# Altium PCB 464HardwareProject.PcbDoc
Units mm, origin at the board's own origin, x right, y up, seen from the top; angles counter-clockwise.
Board outline 62 x 37 mm, 2 copper layers (Top Layer, Bottom Layer); 25 components, 21 nets, 74 pads, 10 vias.
Unrouted connection lines stored in the file: 2.
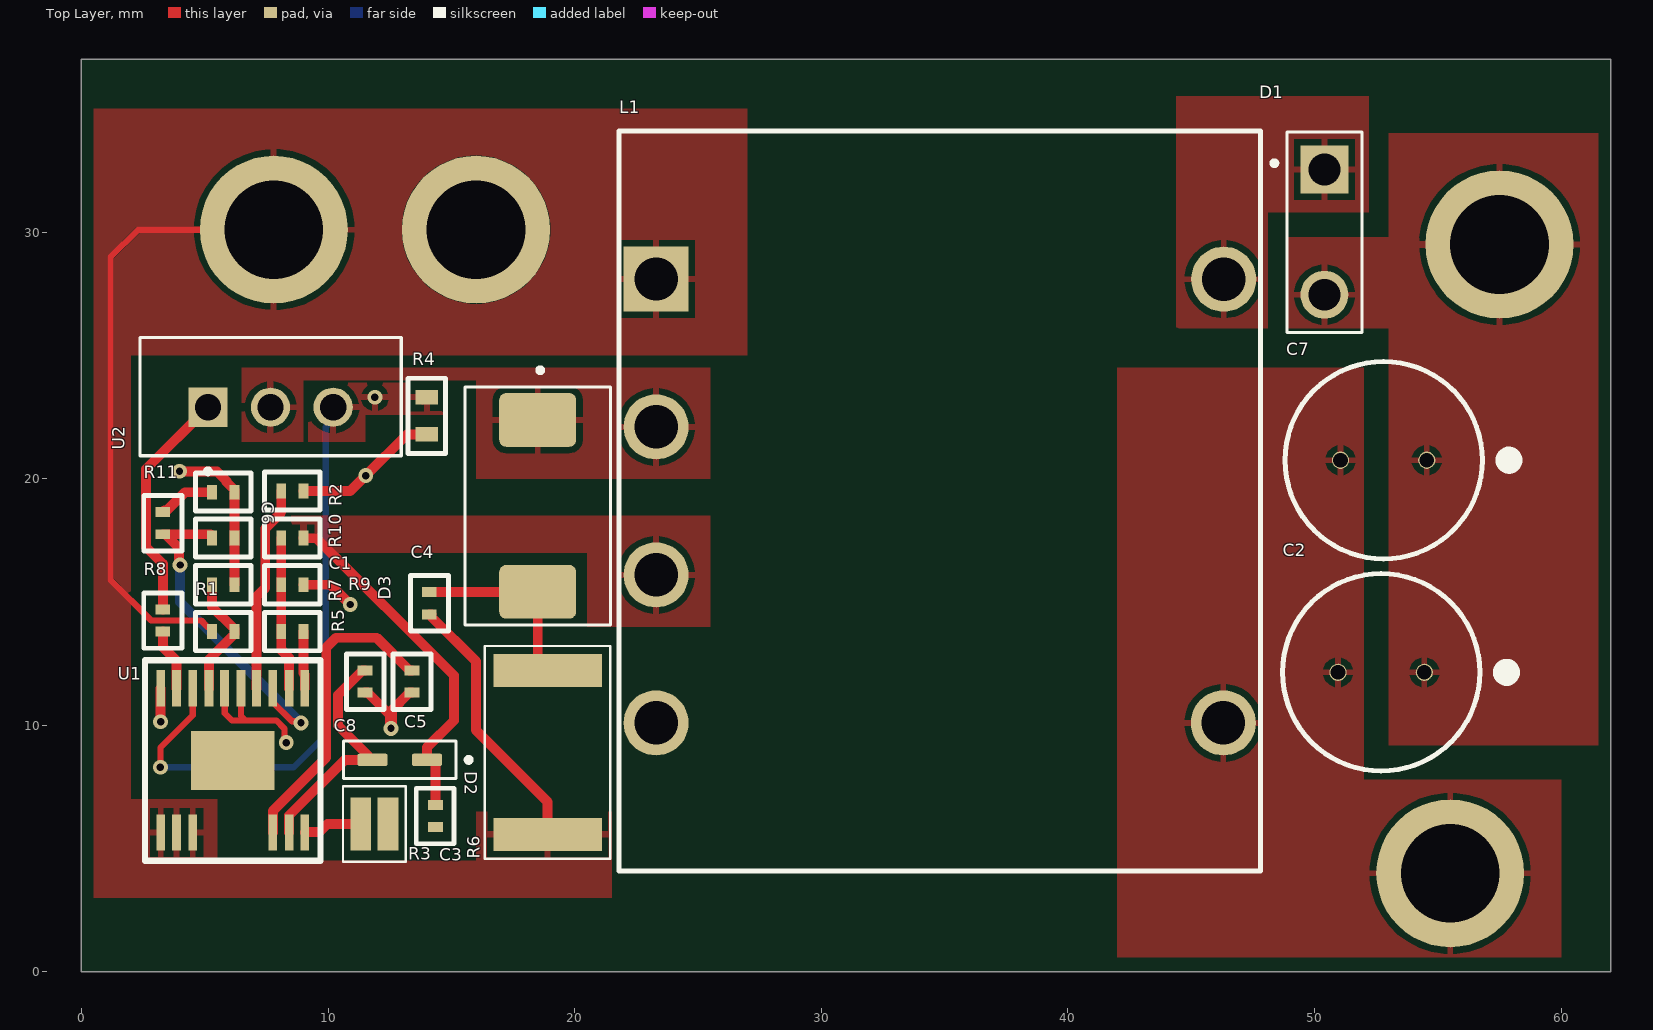
[diagram p0: Top Layer view]
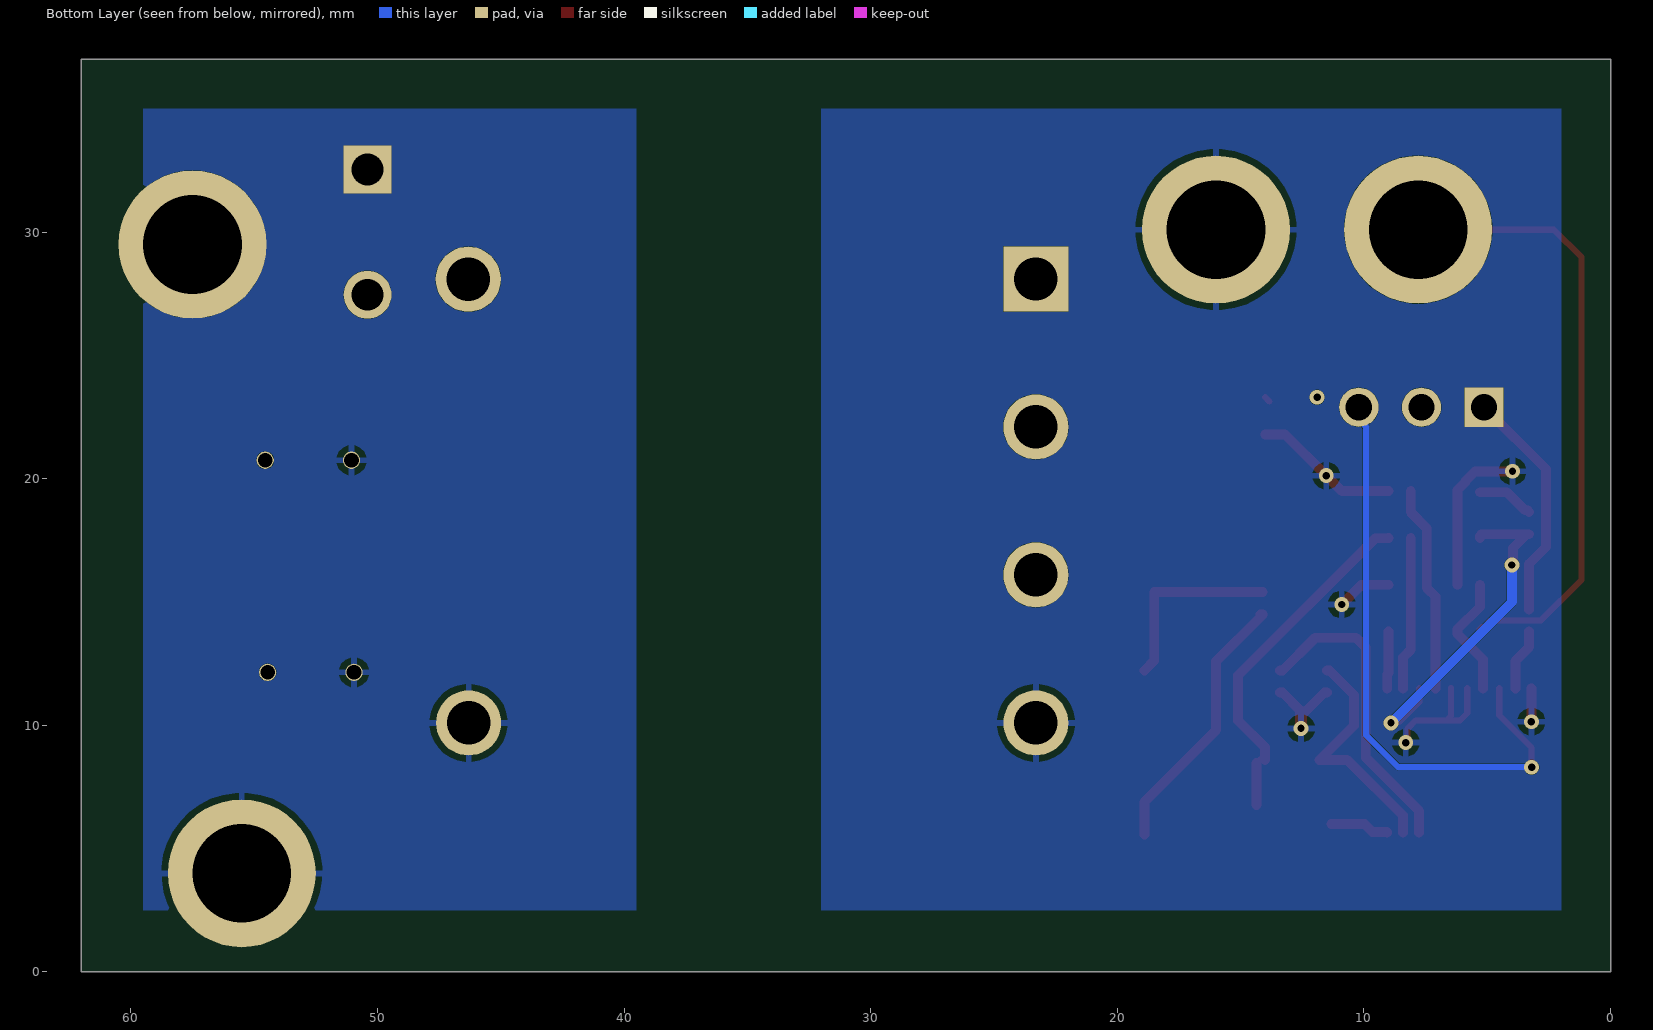
[diagram p1: Bottom Layer view, seen from below]

## Layer stack, top to bottom
Top Solder: solder mask 0.0102, Solder Resist, Dk 3.5
Top Layer: signal copper 0.0356
Dielectric 1: dielectric 0.32, FR-4, Dk 4.8
Bottom Layer: signal copper 0.0356
Bottom Solder: solder mask 0.0102, Solder Resist, Dk 3.5

## Board outline
0,37 0,0 62,0 62,37

## Design rules (kind name [scope] priority, off if disabled: settings)
Clearance [All] p1 off: gap=0.01 ignorepadtopadclearanceinfootprint=FALSE
Height [All] p1 off: minheight=0 maxheight=25.4 prefheight=12.7
PolygonConnect [All] p1: connectstyle=Relief reliefconductorwidth=0.254 reliefentries=4 polygonreliefangle="90 Angle" airgapwidth=0.254
RoutingVias [All] p1: holewidth=0.711 width=1.27 viastyle="Through Hole" minholewidth=0.711 minwidth=1.27 maxholewidth=0.711 maxwidth=1.27
SolderMaskExpansion [All] p1: expansion=0.102 istentingtop=FALSE
Width [All] p1: maxlimit=0.5 minlimit=0.254 preferedwidth=0.254 minimp=50.000000 maximp=50.000000 favimp=50.000000
29 further rules are at their usual default settings.

## Components (designator, comment, footprint, x,y, rotation, side; value= is the part's Value field where it differs from the comment)
C1 "4.7p" "C1 C0402 47pF" 5.75,17.6 r0 top
C2 "330uF" "C2 Output Cap 330uF 16V 13mohm" 52.7,12.15 r180 top
C3 "47pF" "C3 C0402 47pF 100V" 14.35,6.325 r90 top
C4 "1uF" "C6 C0402 1uF"#1 14.1,14.95 r270 top
C5 "4.7uF" "C6 C0402 1uF"#1 13.4,11.775 r270 top
C6 "0.1uF" "C6 C0402 1uF"#2 5.75,19.45 r0 top
C7 "330uF" "C2 Output Cap 330uF 16V 13mohm" 52.8,20.75 r180 top
C8 "4.7uF" "C4 C0402 4.7uF 16V" 11.5,11.775 r270 top
D1 "Diode" "D1 40A 860 mv TO220-2" 50.4,30 r270 top
D2 "Diode" "D2 1A 470mV SOD323-2" 12.905,8.6 r180 top
D3 "Diode" "D3 5A 1.15V DO-214AB" 18.5,18.9 r270 top
L1 "Transformer" TRANSFORMER 21.8,34.1 r270 top
R1 "1.5M" "R1 R0402 1.5M 0.2W" 5.75,13.8 r0 top
R2 "56.2K" "R2 R0402 56.2K" 8.55,19.5 r0 top
R3 "10K" "R3 R0805 10K 1W WIDE-CHIP" 11.875,6 r180 top
R4 "32m" "R4 R0603 32mohm sense" 14,22.55 r270 top
R5 "121K" "R5 R0402 121K" 8.55,13.8 r0 top
R6 "10K" "R11 R3540 10K 4W snubber" 18.9,8.9 r270 top
R7 "4.99K" "R7 R0402 4.99K" 8.55,15.7 r0 top
R8 "10mohm" "R10 R0402 10mohm gate" 3.3,14.25 r90 top
R9 "20K" "R9 R0402 20K" 5.75,15.7 r180 top
R10 "Resistor" "R6 R0402 44.2K 0.25W" 8.55,17.6 r180 top
R11 "10K" "R8 R0402 10K" 3.3,18.2 r90 top
U1 "LT8316IFE#TRPBF" LT8316 6.135,8.579 r90 top
U2 "700V Power Mos" "700V mos" 7.667,22.9 r0 top

## Footprints (in the part's own frame and the unit in brackets; to place one, negate y for a bottom-side part, rotate by r counter-clockwise, add the part's x,y. Pads: shape width x height; smd on the part's side, far side on the other; paste and mask are expansions set on the pad)
"700V mos" [mm]
  rect 1.59x1.59 hole 1.06: 1(-2.54,0)
  round 1.59 hole 1.06: 2(0,0) 3(2.54,0)
  silkscreen extent -5.3,-2.7 5.3,2.83, body extent -5.09,-6.18 5.09,5.13, height 20.48
"C1 C0402 47pF" [mm]
  rect 0.4x0.6 smd: 1(-0.45,0) 2(0.45,0)
  silkscreen extent -1.12,-0.77 1.12,0.77, body extent -0.5,-0.25 0.5,0.25, height 0.46
"C2 Output Cap 330uF 16V 13mohm" [mm]
  round 0.7 hole 0.6: 1(-1.75,0) 2(1.75,0)
  silkscreen extent -5.33,-4 4,4, body extent -4,-4 4,4, height 6.91
"C3 C0402 47pF 100V" [mm]
  rect 0.4x0.6 smd: 1(-0.45,0) 2(0.45,0)
  silkscreen extent -1.12,-0.76 1.12,0.77, body extent -0.5,-0.25 0.5,0.25, height 0.46
"C4 C0402 4.7uF 16V" [mm]
  rect 0.4x0.6 smd: 1(-0.45,0) 2(0.45,0)
  silkscreen extent -1.12,-0.76 1.12,0.77, body extent -0.5,-0.25 0.5,0.25, height 0.46
"C6 C0402 1uF"#1 [mm]
  rect 0.4x0.6 smd: 1(-0.45,0) 2(0.45,0)
  silkscreen extent -1.12,-0.76 1.12,0.77, body extent -0.5,-0.25 0.5,0.25, height 0.46
"C6 C0402 1uF"#2 [mm]
  rect 0.4x0.6 smd: 2(0.45,0) "   "(-0.45,0)
  silkscreen extent -1.12,-0.76 1.12,0.77, body extent -0.5,-0.25 0.5,0.25, height 0.46
"D1 40A 860 mv TO220-2" [mm]
  rect 1.94x1.94 hole 1.29: 1(-2.54,0)
  round 1.94 hole 1.29: 2(2.54,0)
  silkscreen extent -4.06,-2.13 4.06,1.52, body extent -4.83,-2.21 4.83,2.29, height 15.39
"D2 1A 470mV SOD323-2" [mm]
  rrect25% 1.21x0.5 smd: 1(-1.105,0) 2(1.105,0)
  silkscreen extent -2.89,-0.76 2.29,0.76, body extent -1.25,-0.62 1.25,0.63, height 1.06
"D3 5A 1.15V DO-214AB" [mm]
  rrect25% 2.18x3.12 smd: 1(-3.485,0) 2(3.485,0)
  silkscreen extent -5.6,-2.95 4.83,2.95, body extent -3.97,-2.95 3.97,2.95, height 2.63
LT8316 [mil]
  rect 58x14 smd: 1(-115,115) 2(-115,90) 3(-115,64) 8(-115,-64) 9(-115,-90) 10(-115,-115) 11(115,-115) 12(115,-90) 13(115,-64) 14(115,-38) 15(115,-13) 16(115,13) 17(115,38) 18(115,64) 19(115,90) 20(115,115)
  rect 94x134 smd: 21(0,0)
  silkscreen extent -160,-140 160,140, body extent -126,-128 126,128, height 42
"R1 R0402 1.5M 0.2W" [mm]
  rect 0.4x0.6 smd: 1(-0.45,0) 2(0.45,0)
  silkscreen extent -1.12,-0.77 1.12,0.77, body extent -0.5,-0.25 0.5,0.25, height 0.36
"R2 R0402 56.2K" [mm]
  rect 0.4x0.6 smd: 1(-0.45,0) 2(0.45,0)
  silkscreen extent -1.12,-0.77 1.12,0.77, body extent -0.5,-0.25 0.5,0.25, height 0.35
"R3 R0805 10K 1W WIDE-CHIP" [mm] "Chip Resistor, 2-Leads, Body 1,25x2,00mm, IPC Medium Density"
  rect 0.85x2.15 smd: 1(-0.55,0) 2(0.55,0)
  silkscreen extent -1.27,-1.52 1.27,1.52, body extent -0.7,-1.07 0.7,1.08, height 0.65
"R4 R0603 32mohm sense" [mm]
  rect 0.6x0.9 smd: 1(-0.75,0) 2(0.75,0)
  silkscreen extent -1.52,-0.76 1.52,0.76, body extent -0.8,-0.4 0.8,0.4, height 0.56
"R5 R0402 121K" [mm]
  rect 0.4x0.6 smd: 1(-0.45,0) 2(0.45,0)
  silkscreen extent -1.12,-0.77 1.12,0.77, body extent -0.5,-0.25 0.5,0.25, height 0.35
"R6 R0402 44.2K 0.25W" [mm]
  rect 0.4x0.6 smd: 1(-0.45,0) 2(0.45,0)
  silkscreen extent -1.12,-0.77 1.12,0.77, body extent -0.5,-0.25 0.5,0.25, height 0.36
"R7 R0402 4.99K" [mm]
  rect 0.4x0.6 smd: 1(-0.45,0) 2(0.45,0)
  silkscreen extent -1.12,-0.77 1.12,0.77, body extent -0.5,-0.25 0.5,0.25, height 0.36
"R8 R0402 10K" [mm]
  rect 0.4x0.6 smd: 1(-0.45,0) 2(0.45,0)
  silkscreen extent -1.12,-0.77 1.12,0.77, body extent -0.5,-0.25 0.5,0.25, height 0.36
"R9 R0402 20K" [mm]
  rect 0.4x0.6 smd: 1(-0.45,0) 2(0.45,0)
  silkscreen extent -1.12,-0.77 1.12,0.77, body extent -0.5,-0.25 0.5,0.25, height 0.36
"R10 R0402 10mohm gate" [mm]
  rect 0.4x0.6 smd: 1(-0.45,0) 2(0.45,0)
  silkscreen extent -1.12,-0.77 1.12,0.77, body extent -0.5,-0.25 0.5,0.25, height 0.35
"R11 R3540 10K 4W snubber" [mm]
  rect 1.35x4.4 smd: 1(-3.325,0) 2(3.325,0)
  silkscreen extent -4.32,-2.54 4.32,2.54, body extent -3.65,-2.2 3.65,2.2, height 0.65
TRANSFORMER [mm]
  rect 2.64x2.64 hole 1.76: 1(6,1.5)
  round 2.64 hole 1.76: 2(12,1.5) 3(18,1.5) 4(24,1.5) 5(6.009,24.518) 6(24,24.5)
  silkscreen extent 0,0 30,26, body extent 0,3.11 30,22.89, height 30

## Part data
C1 C2 C3 C4 C5 C6 C7 C8: library part Capacitor
R1 R2 R3 R4 R5 R6 R7 R8 R9 R11: library part Resistor
U1: "DC/DC Cntrlr Single-OUT 142kHz Automotive 16-Pin TSSOP EP T/R", Manufacturer="Analog Devices", Supplier Part Number 1=LT8316IFE#TRPBF-ND, Manufacturer Part Number=LT8316IFE#TRPBF, Pricing 1="2500=3,34500 (USD)", Supplier 1=Digi-Key

## Free pads (board coordinates)
  round 6 hole 4: 1(7.8,30.1) 2(16,30.1) 3(57.5,29.5) 4(55.5,4)

## Via types
v1: diameter 0.6, hole 0.3, Top Layer to Bottom Layer, 10 vias

## Nets (pads, with @x,y where several pads share a name; then routed paths per layer and width w, separated by ;. In a path a pad name is that pad's centre, name@x,y a point inside that pad or via, vN(x,y) a via of type N, cw(c..) or ccw(c..) an arc to the next point about the centre after c; other vN are vias at no path point)
Control: C3.2 D2.1 L1.3 R10.1 | length 14.4
  Top Layer w0.254: D2.1 14.227,8.6 D2.1@14.35,8.477
  Top Layer w0.4: R10.1 9,17.588 9.537,17.588 15.1,12.025 15.1,10.2 14.01,9.11 D2.1 ; C3.2 D2.1@14.35,8.477
GATE: R8.1 U1.19 | length 2.5
  Top Layer w0.4: R8.1 3.3,13.167 3.849,12.619 U1.19
GND: C1.2 C5.2 C6.2 C8.2 L1.4 pad.2 R2.2 R4.2 R7.2 R9.1 U1.15 U1.16 U1.20 | length 26.4
  Top Layer w0.254: U1.16 5.805,10.495 6.1,10.2 6.649,10.2 ; U1.15 6.466,11.499 6.466,10.382 6.649,10.2 ; v1(8.3,9.3) 8.234,9.366 8.234,9.866 7.9,10.2 6.649,10.2
  Top Layer w0.4: U1.20 3.207,11.493 v1(3.207,10.15) v1@3.257,10.2 ; v1(3.975,20.3) 5.489,20.3 5.881,19.908 5.881,19.869 6.2,19.55 C6.2 C1.2 ; R9.1 C1.2 ; 6.2,16.709 C1.2 ; R7.2 10.1,15.7 v1(10.9,14.9) ; R2.2 10.9,19.5 v1(11.525,20.125) 13.2,21.8 R4.2 ; C8.2 11.6,11.325 12.512,10.413 12.512,9.913 v1(12.55,9.875) 12.588,9.913 12.588,10.613 13.3,11.325 C5.2
ISOGND: C2.2 C7.2 L1.6 pad.4
NetC1_1: C1.1 R11.1 U1.13 | length 14.1
  Top Layer w0.254: U1.13 7.76,10.941 8.535,10.166 8.834,10.166 v1(8.9,10.1)
  Top Layer w0.4: R11.1 R11.1@3.4,17.75 ; v1(4,16.5) 3.962,16.538 3.962,17.188 R11.1@3.4,17.75 ; C1.1 5.3,17.677 5.227,17.75 R11.1@3.4,17.75
  Bottom Layer w0.4: v1(4,16.5) 4,15 v1(8.9,10.1)
NetC3_1: C3.1 R3.1
NetC4_1: C4.1 D3.2 R6.1 | length 7.8
  Top Layer w0.4: C4.1 18.485,15.4 D3.2 18.5,12.625 R6.1
NetC5_1: C5.1 U1.8 | length 12.6
  Top Layer w0.4: U1.8 7.76,6.535 9.925,8.7 9.925,13.15 10.325,13.55 11.975,13.55 13.3,12.225 C5.1
NetC6_1: "C6.   " R11.2 | length 2.3
  Top Layer w0.4: R11.2 3.373,18.723 3.473,18.723 4.2,19.45 5.3,19.45
NetC8_1: C8.1 D2.2 U1.9 | length 9.7
  Top Layer w0.4: U1.9 8.421,6.346 10.675,8.6 D2.2 10.4,10 10.4,11.225 11.4,12.225 C8.1
NetD1_1: D1.1 L1.5
NetD3_1: D3.1 L1.2 U2.2
NetR2_1: R2.1 U1.14 | length 8.4
  Top Layer w0.4: U1.14 7.1,15.218 7.45,15.568 7.45,17.989 8.1,18.639 R2.1
NetR3_2: R3.2 U1.10 | length 2.4
  Top Layer w0.4: U1.10 9.073,5.675 9.65,5.675 9.975,6 R3.2
NetR5_1: R5.1 R7.1 R10.2 U1.12 | length 6.2
  Top Layer w0.4: R10.2 R7.1 R5.1 8.1,13.065 8.421,12.744 U1.12
NetR5_2: R5.2 U1.11 | length 2.3
  Top Layer w0.4: R5.2 9,12.115 9.056,12.059 U1.11
NetR8_2: R8.2 U2.1 | length 9.5
  Top Layer w0.4: R8.2 3.3,16.55 2.619,17.231 2.619,20.392 U2.1
Output: C2.1 C7.1 D1.2 pad.3
Sense: R4.1 U1.18 U2.3 | length 25
  Top Layer w0.254: v1(3.2,8.3) 3.2,9.1 4.509,10.409 U1.18 ; U2.3 U2.3@10.434,23.127 ; R4.1@13.827,23.127 R4.1
  Bottom Layer w0.254: v1(3.2,8.3) 8.6,8.3 9.9,9.6 9.9,22.083 9.951,22.134 9.951,22.644 U2.3
  other v1: 11.9,23.3
UVLO: R1.2 R9.2 U1.17 | length 5
  Top Layer w0.4: U1.17 5.17,12.67 6.2,13.7 6.2,13.9 5.3,14.8 R9.2
VCC: C4.2 L1.1 pad.1 R1.1 R6.2 U1.1 U1.2 U1.3 | length 36.2
  Top Layer w0.254: R1.1 5.3,13.9 5.227,13.973 5.127,13.973 4.85,14.25 2.825,14.25 1.175,15.9 1.175,28.975 2.3,30.1 pad.1
  Top Layer w0.4: C4.2 14.2,14.5 14.2,14.4 16,12.6 16,9.8 18.9,6.9 R6.2
pads on no net: U1.21

## Polygon pours and split planes (outlines as drawn)
GND on Bottom Layer "GND_L02_P001" (solid, pour order 1): 2,35 2,2.5 32,2.5 32,35
ISOGND on Bottom Layer "ISOGND_L02_P002" (solid, pour order 2): 39.5,35 39.5,2.5 59.5,2.5 59.5,35
VCC on Top Layer "VCC_L01_P005" (solid, pour order 5): 0.5,3 21.5,3 21.5,6.5 16,6.5 16,4.5 0.5,4.5
VCC on Top Layer "VCC_L01_P004" (solid, pour order 4): 0.5,4 5.5,4 5.5,7 2,7 2,29 0.5,29
VCC on Top Layer "VCC_L01_P003" (solid, pour order 3): 27,35 27,25 0.5,25 0.5,35
Control on Top Layer "CONTROL_L01_P011" (solid, pour order 11): 25.5,14 25.5,18.5 8.5,18.5 8.5,17 21,17 21,14
Control on Top Layer "CONTROL_L01_P006" (solid, pour order 6): 25.5,14 25.5,18 8.5,18 8.5,17 20.5,17 20.5,14
Sense on Top Layer "SENSE_L01_P020" (solid, pour order 20): 9.2,21.5 9.2,23.9 14.7,23.9 14.8,23.8 14.8,22.6 11.5,22.6 11.5,21.5
NetD3_1 on Top Layer "NETD3_1_L01_P014" (solid, pour order 14): 16,24.5 6.5,24.5 6.5,21.5 9,21.5 9,24 17,24
NetD1_1 on Top Layer "NETD1_1_L01_P018" (solid, pour order 18): 48.1,26.1 44.5,26.1 44.4,26 44.4,35.5 52.3,35.5 52.2,35.5 52.2,35.2 52.2,30.8 48.1,30.8
Output on Top Layer "OUTPUT_L01_P017" (solid, pour order 17): 48.9,29.8 48.9,26.1 54.8,26.1 54.9,26 54.9,29.8
ISOGND on Top Layer "ISOGND_L01_P016" (solid, pour order 16): 60,7.8 60,0.6 42,0.6 42,24.5 52,24.5 52,7.8
Output on Top Layer "OUTPUT_L01_P015" (solid, pour order 15): 61.5,9.2 53,9.2 53,34 61.5,34
NetD3_1 on Top Layer "NETD3_1_L01_P013" (solid, pour order 13): 25.5,20 25.5,24.5 16,24.5 16,20